# Altium PCB PCB1.PcbDoc
Units mil, origin at the board's own origin, x right, y up, seen from the top; angles counter-clockwise.
Board outline 2458.37 x 2458.37 mil, 2 copper layers (Top Layer, Bottom Layer); 25 components, 5 nets, 53 pads, 0 vias.
Unrouted connection lines stored in the file: 43.
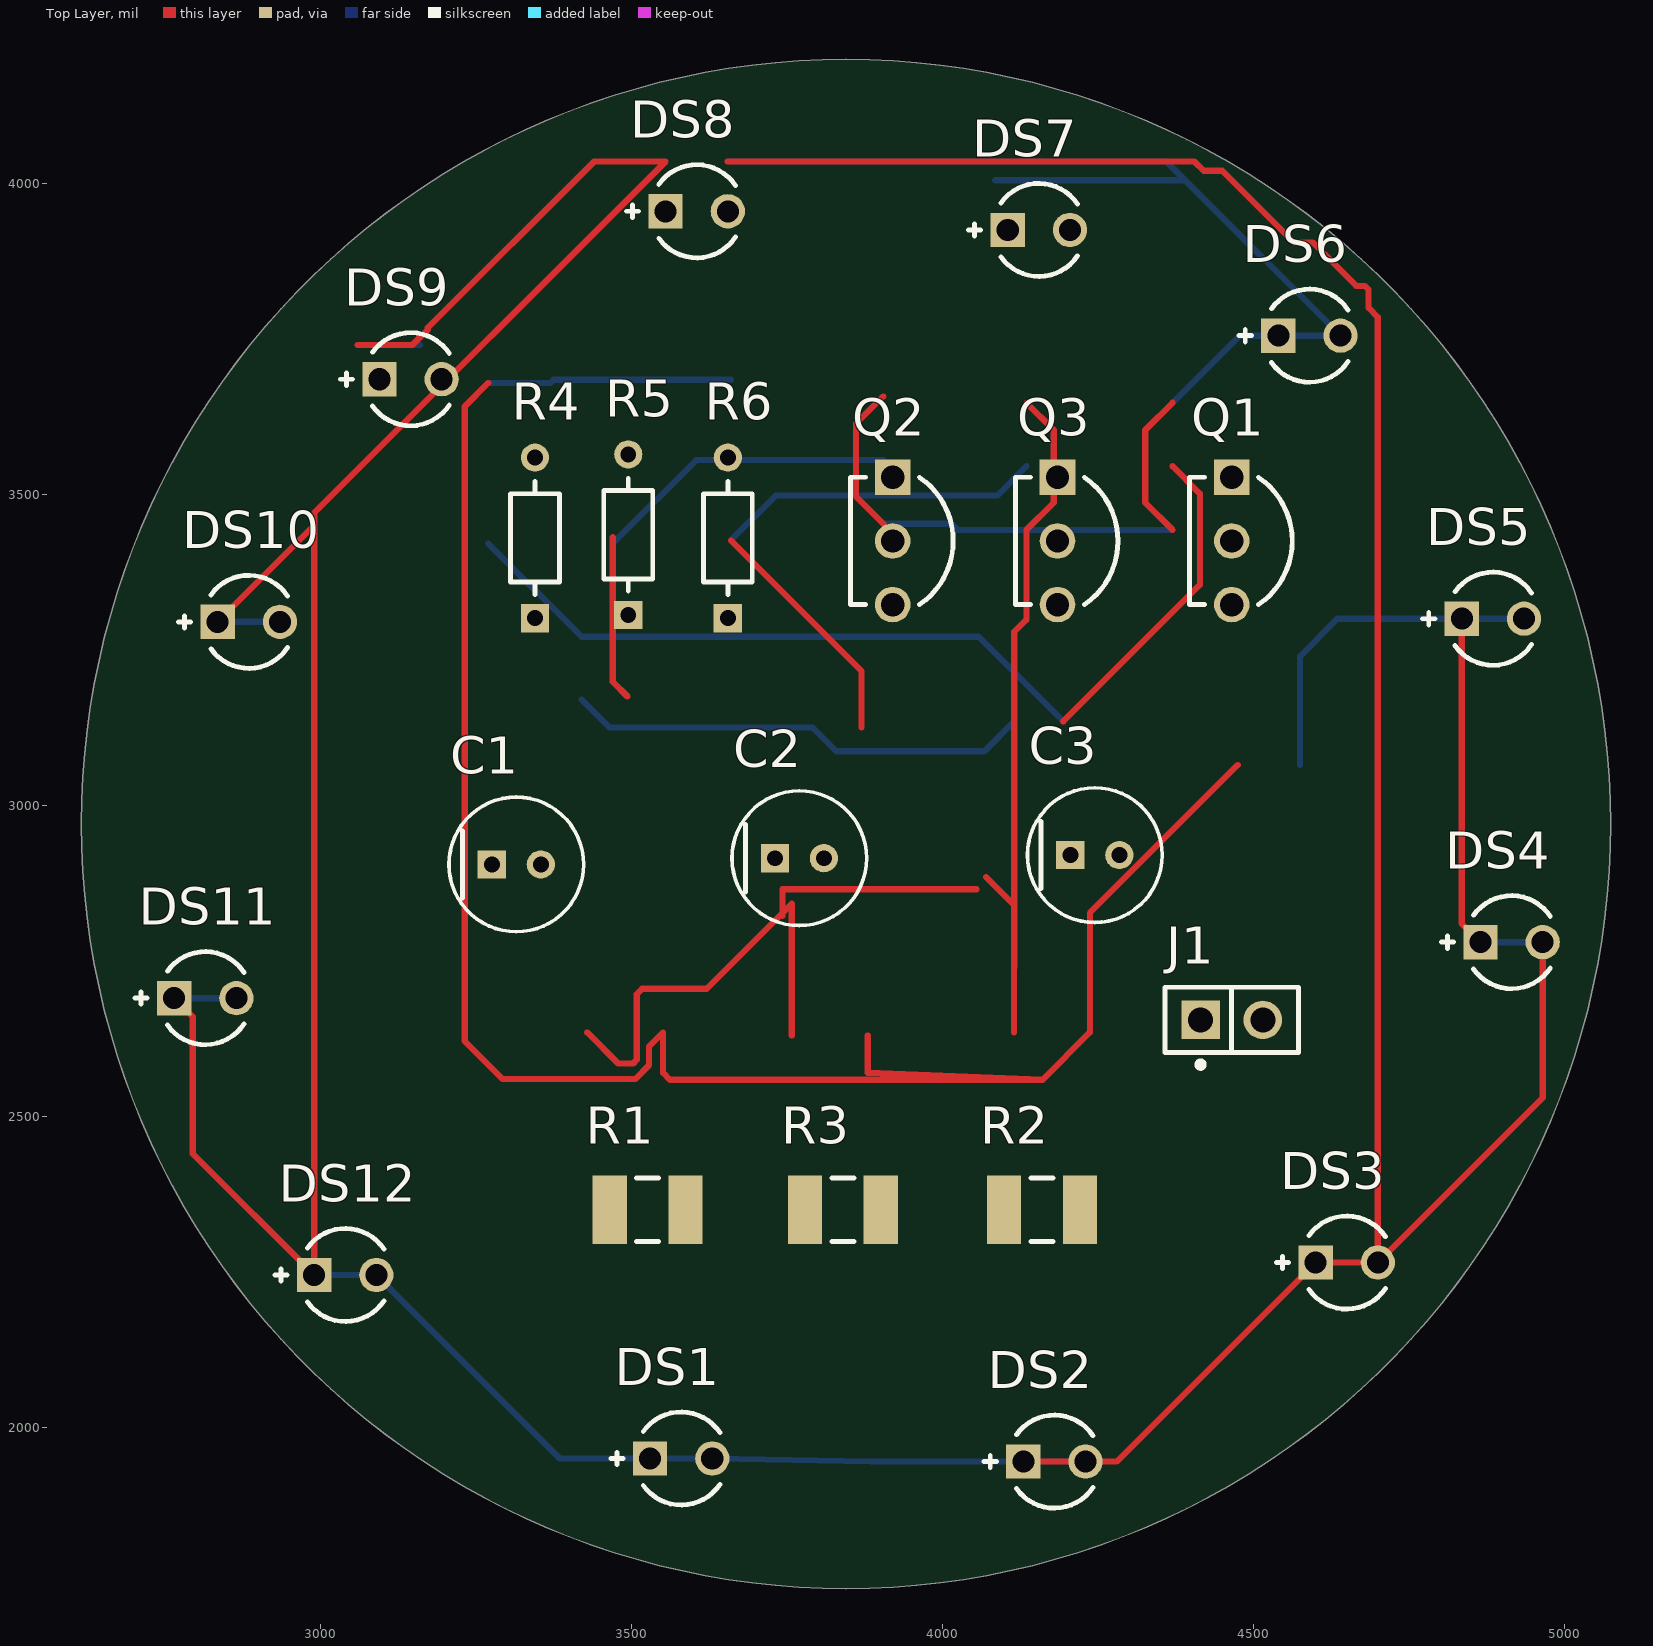
[diagram p0: Top Layer view]
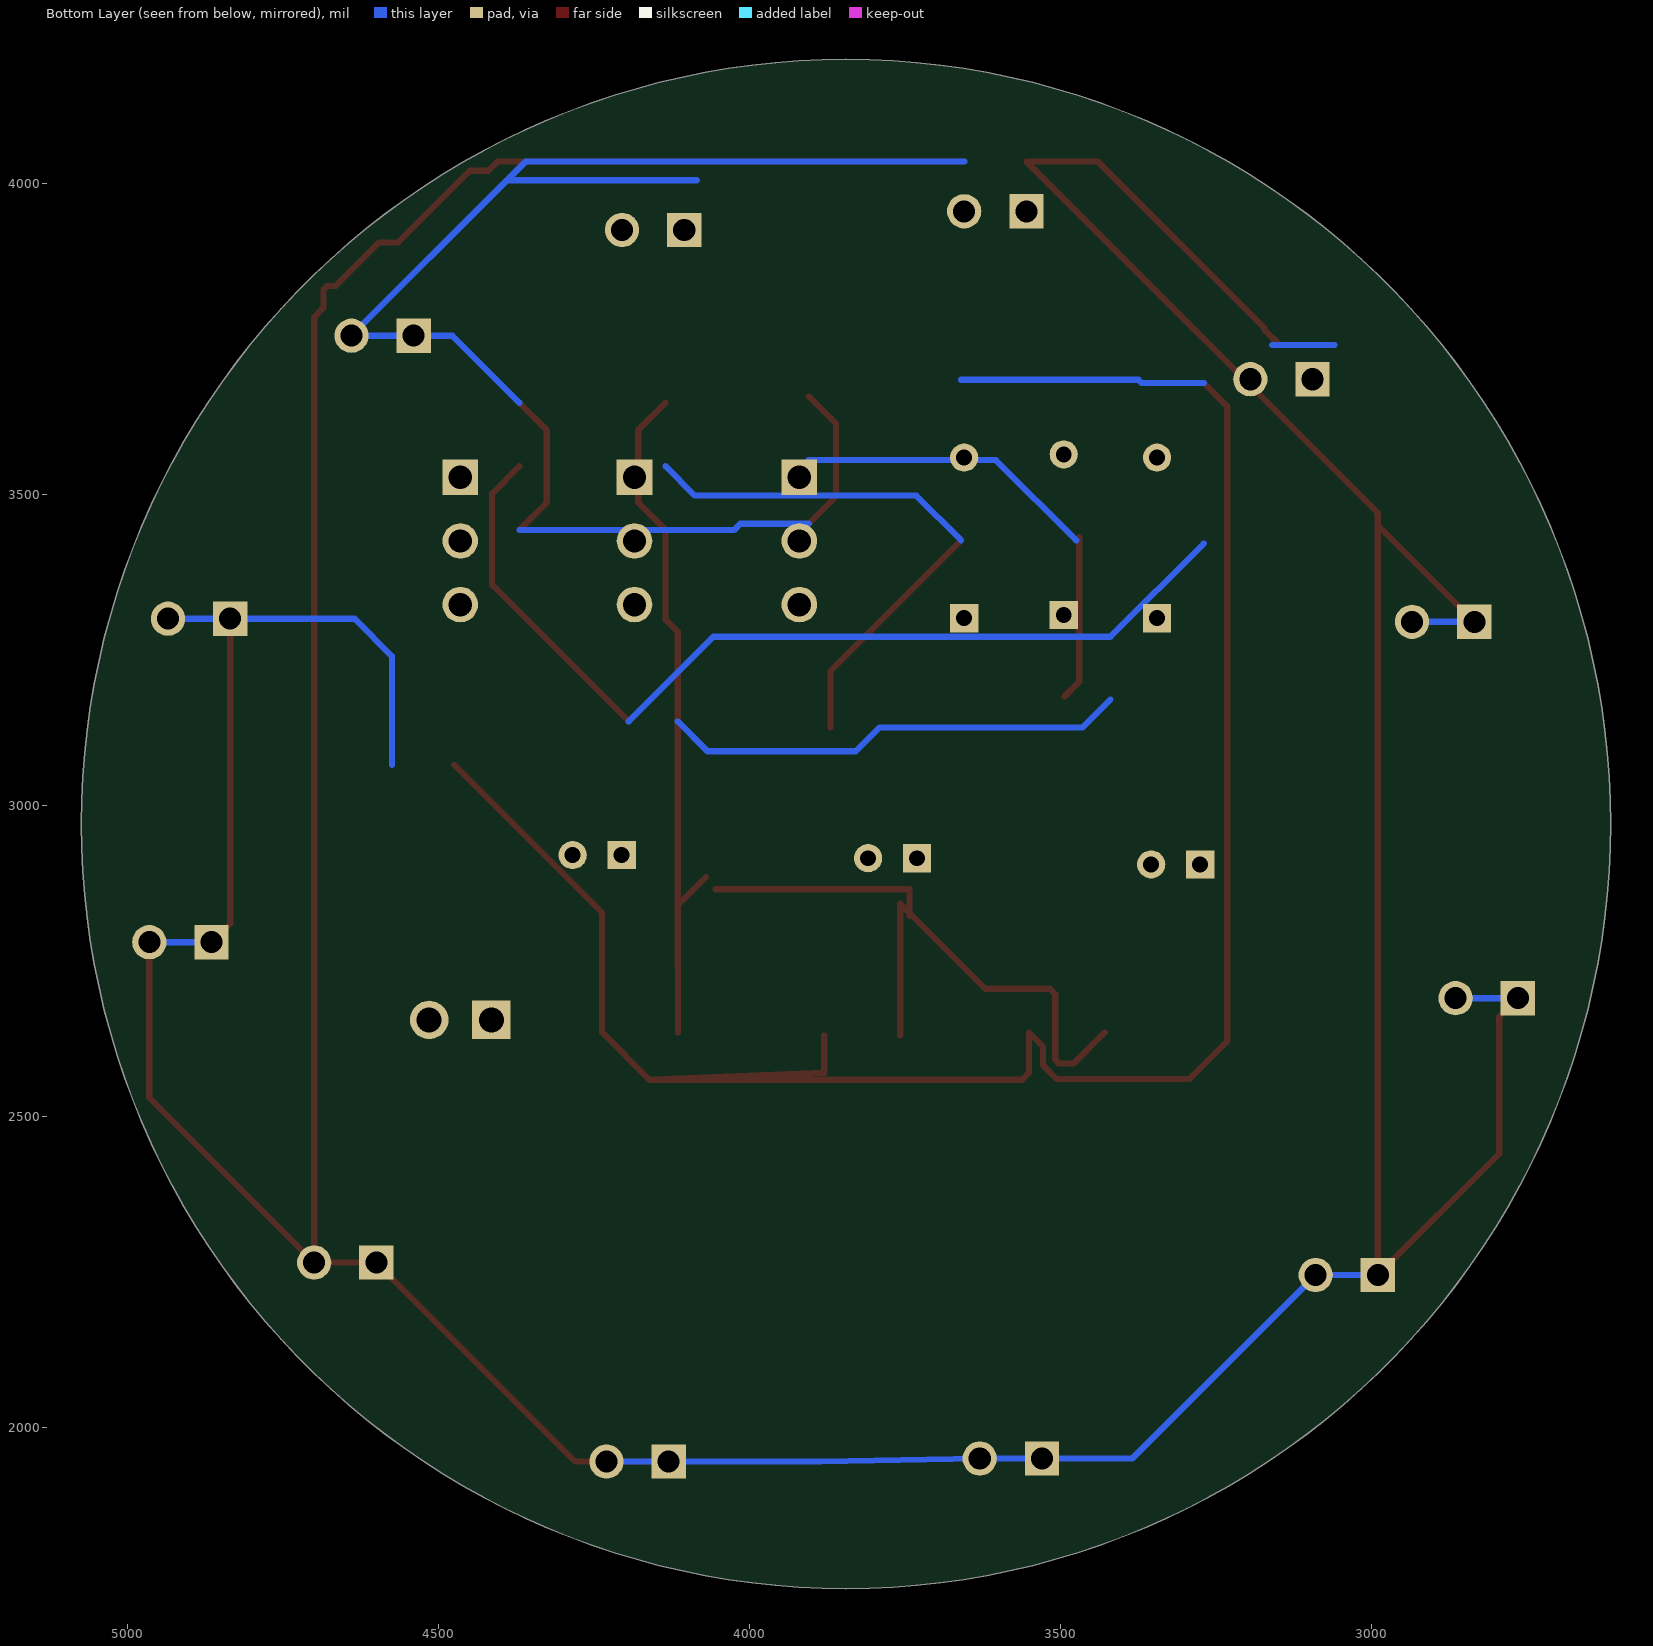
[diagram p1: Bottom Layer view, seen from below]

## Layer stack, top to bottom
Top Solder: solder mask 0.4, Solder Resist, Dk 3.5
Top Layer: signal copper 1.4
Dielectric 1: dielectric 12.6, FR-4, Dk 4.8
Bottom Layer: signal copper 1.4
Bottom Solder: solder mask 0.4, Solder Resist, Dk 3.5

## Board outline
2615.81,2970 ccw(c3845,2970) 3845,1740.81 ccw(c3845,2970) 5074.19,2970 ccw(c3845,2970) 3845,4199.19 ccw(c3845,2970)

## Design rules (kind name [scope] priority, off if disabled: settings)
Clearance [All] p1: gap=10 ignorepadtopadclearanceinfootprint=FALSE
PolygonConnect [All] p1: connectstyle=Relief reliefconductorwidth=10 reliefentries=4 polygonreliefangle="90 Angle" airgapwidth=10
RoutingVias [All] p1: holewidth=28 width=50 viastyle="Through Hole" minholewidth=28 minwidth=50 maxholewidth=28 maxwidth=50
SolderMaskExpansion [All] p1: expansion=0 istentingtop=FALSE
Width [All] p1: maxlimit=10 minlimit=10 preferedwidth=10
30 further rules are at their usual default settings.

## Components (designator, comment, footprint, x,y, rotation, side; value= is the part's Value field where it differs from the comment)
C1 "UVR2AR22MDD1TD" FP-UVR2AR22MDD1TD-MFG 3315,2905 r0 top
C2 "UVR2AR22MDD1TD" FP-UVR2AR22MDD1TD-MFG 3770,2915 r0 top
C3 "UVR2AR22MDD1TD" FP-UVR2AR22MDD1TD-MFG 4245,2920 r0 top
DS1 "LTL-1CHE" INDPR60-254-520X380X650 3580,1950 r0 top
DS2 "LTL-1CHE" INDPR60-254-520X380X650 4180,1945 r0 top
DS3 "LTL-1CHE" INDPR60-254-520X380X650 4650,2265 r0 top
DS4 "LTL-1CHE" INDPR60-254-520X380X650 4915,2780 r0 top
DS5 "LTL-1CHE" INDPR60-254-520X380X650 4885,3300 r0 top
DS6 "LTL-1CHE" INDPR60-254-520X380X650 4590,3755 r0 top
DS7 "LTL-1CHE" INDPR60-254-520X380X650 4155,3925 r0 top
DS8 "LTL-1CHE" INDPR60-254-520X380X650 3605,3955 r0 top
DS9 "LTL-1CHE" INDPR60-254-520X380X650 3145,3685 r0 top
DS10 "LTL-1CHE" INDPR60-254-520X380X650 2885,3295 r0 top
DS11 "LTL-1CHE" INDPR60-254-520X380X650 2815,2690 r0 top
DS12 "LTL-1CHE" INDPR60-254-520X380X650 3040,2245 r0 top
J1 "TSW-102-14-G-S" FP-TSW-102-14-G-S-MFG 4465,2655 r0 top
Q1 "2N5550TFR" FP-135AR-MFG 4479.96,3425 r0 top
Q2 "2N5550TFR" FP-135AR-MFG 3934.96,3425 r0 top
Q3 "2N5550TFR" FP-135AR-MFG 4199.96,3425 r0 top
R1 "CRCW1210330RJNTA" RESC3225X60X45ML20T20 3526.02,2350 r0 top
R2 "CRCW1210330RJNTA" RESC3225X60X45ML20T20 4160,2350 r0 top
R3 "CRCW1210330RJNTA" RESC3225X60X45ML20T20 3840,2350 r0 top
R4 "CF18JT10K0" FP-CF18-MFG 3345,3430 r90 top value=10kΩ
R5 "CF18JT10K0" FP-CF18-MFG 3495,3435 r90 top value=10kΩ
R6 "CF18JT10K0" FP-CF18-MFG 3655,3430 r90 top value=10kΩ

## Footprints (in the part's own frame and the unit in brackets; to place one, negate y for a bottom-side part, rotate by r counter-clockwise, add the part's x,y. Pads: shape width x height; smd on the part's side, far side on the other; paste and mask are expansions set on the pad)
FP-135AR-MFG [mm]
  rect 1.45x1.45 hole 0.95 paste-2539.97 mask+0: 1(-0.38,2.6)
  round 1.45 hole 0.95 paste-2539.97 mask+0: 2(-0.38,0) 3(-0.38,-2.6)
  silkscreen extent -2.1,-2.6 2.09,2.6, body extent -2.19,-3.42 2.19,3.42, height 0.25
FP-CF18-MFG [mm]
  rect 1.15x1.15 hole 0.65 paste-2539.97 mask+0: 1(-3.28,0)
  round 1.15 hole 0.65 paste-2539.97 mask+0: 2(3.28,0)
  silkscreen extent -2.3,-1 2.3,1, body extent -3.96,-1.1 3.96,1.1, height 0.25
FP-TSW-102-14-G-S-MFG [mm]
  rect 1.57x1.57 hole 1.02 paste-2539.97 mask+0: 1(-1.27,0)
  round 1.57 hole 1.02 paste-2539.97 mask+0: 2(1.27,0)
  silkscreen extent -2.73,-1.95 2.73,1.34, body extent -2.83,-1.44 2.83,1.44, height 0.25
FP-UVR2AR22MDD1TD-MFG [mm]
  rect 1.15x1.15 hole 0.65 paste-2539.97 mask+0: 1(-1,0)
  round 1.15 hole 0.65 paste-2539.97 mask+0: 2(1,0)
  silkscreen extent -2.75,-2.75 2.75,2.75, body extent -2.85,-2.85 2.85,2.85, height 0.25
INDPR60-254-520X380X650 [mm] "THD, 2-Leads, Dia 3.8mm, Pitch 2.54mm"
  rect 1.4x1.4 hole 0.9: 1(-1.27,0)
  round 1.4 hole 0.9: 2(1.27,0)
  silkscreen extent -2.87,-1.9 1.58,1.9, body extent -1.9,-1.9 1.9,1.9, height 6.5
RESC3225X60X45ML20T20 [mm] "Chip Resistor, 2-Leads, Body 3.20x2.50mm, IPC Low Density"
  rect 1.4x2.8 smd: 1(-1.55,0) 2(1.55,0)
  silkscreen extent -0.45,-1.3 0.45,1.3, body extent -1.7,-1.35 1.7,1.35, height 0.6

## Part data
C1 C2 C3: library part CMP-12462-000035-1, "CAP ALUM 0.22UF 20% 100V RADIAL", Capacitance=220nF, Case/Package=Radial, Dielectric Material=Aluminium, Max Operating Temperature=85°C, Min Operating Temperature=-40°C, Package Quantity=2000, Ripple Current=4.7mA, Tolerance=20%, Voltage Rating=100V, Diameter=5mm, Dissipation Factor=0.08%, Height=11mm, Height - Seated (Max)=0.492inch, Lead Pitch=2mm, Lead/Base Style=Straight, Length=11mm, Life (Hours)=2000Hour, Mount="Through Hole", Packaging="Tape and Reel", REACH SVHC="No SVHC", RoHS Compliant=Yes, Series=VR, Termination=Radial, Voltage Rating (DC)=100V
DS1 DS2 DS3 DS4 DS5 DS6 DS7 DS8 DS9 DS10 DS11 DS12: library part CMP-1674-00005-1, "Radial LED, 12.6 mcd, 20 mA, 2 V, -55 to 100 degC, 2-Pin THD, RoHS, Bulk", Case\Package=Radial, Current Rating="3.6 A", Max Operating Temperature="130 degC", Min Operating Temperature="-40 degC", Package Quantity=55, Resistance="0.045 Ohm", Tolerance=20%, ComponentLink1Description="Manufacturer URL", ComponentLink1URL=http://www.us.liteon.com/, ComponentLink2Description=Datasheet, ComponentLink2URL=https://datasheet.ciiva.com/15117/getdatasheetpartid-187746-15117985.pdf, DatasheetVersion=Dec-03, Height="1.1 inch", Lead Pitch="11.44 mm", Length="0.97 inch", Mount="Through Hole", PackageDescription="2-Pin Through Hole Device, Dia 3.8 mm, Pitch 2.54 mm", PackageReference=LTL-1CHE, Packaging=Tray, Radiation Hardening=No, RoHSCompliant=true, Shielding=Unshielded, Width="0.62 inch"
J1: library part CMP-02766-001740-1, "CONN HEADER VERT 2POS 2.54MM", Color=Black, Flammability Rating="UL94 V-0", Max Current Rating=7.6A, Max Operating Temperature=125°C, Max Voltage Rating (AC)=550V, Min Operating Temperature=-55°C, Package Quantity=1, Connector Type=Header, Contact Finish - Mating=GOLD, Contact Material=Bronze, Contact Mating Length=0.32inch, Contact Plating=Gold, Contact Shape=Square, Contact Type="Male Pin", Depth=2.54mm, Fastening Type=Pull, Gender=Male, Housing Color=Black, Housing Material=Polyester, Insulation Color=Black, Insulation Material=PBT, Lead Free="Lead Free", Length=5.08mm, Mount="Through Hole", Number of Contacts=2, Number of Positions=2, Number of Rows=1, Orientation=Straight, Packaging=Bulk, Pitch=2.54mm, Radiation Hardening=No, REACH SVHC="No SVHC", RoHS Compliant=Yes, Series=TSW, Termination=Solder, Width=2.54mm
Q1 Q2 Q3: library part CMP-00278-84408887-1, "2N5550TFR Transistor, bjt, npn, 140V V(Br)Ceo, 600Ma I(C), to-92 Rohs Compliant: Yes", Case/Package=TO-92-3, Collector Base Voltage (VCBO)=160V, Collector Emitter Breakdown Voltage=140V, Collector Emitter Saturation Voltage=250mV, Current Rating=600mA, Emitter Base Voltage (VEBO)=6V, Frequency=300MHz, Manufacturer Lifecycle Status=ACTIVE, Max Junction Temperature (Tj)=150°C, Max Power Dissipation=625mW, Min Operating Temperature=-55°C, Collector Emitter Voltage (VCEO)=140V, Element Configuration=Single, Gain Bandwidth Product=300MHz, Height=4.58mm, hFE Min=60, Lead Free="Lead Free", Length=4.58mm, Lifecycle Status=Production, Max Breakdown Voltage=140V, Max Collector Current=600mA, Max Frequency=300MHz, Max Operating Temperature=150°C, Mount="Through Hole", NexarPartId=84408887, Number of Elements=1, Number of Pins=3, Polarity=NPN, Power Dissipation=625mW, Radiation Hardening=No, RoHS=Compliant, Schedule B="8541210080, 8541210080", Transition Frequency=300MHz, Voltage Rating (DC)=140V, Weight=240mg, Width=3.86mm
R1 R2 R3: library part CMP-2005-00707-1, Manufacturer="Vishay Dale", Part Number=CRCW1210330RJNTA
R4 R5 R6: library part CMP-26528-000002-1, "RES 10K OHM 1/8W 5% CF AXIAL", Manufacturer="Stackpole Electronics", Package=CF18, Power Rating=0.125W, Resistance=10kΩ, Temperature="-55°C to +155°C", Temperature Coefficient=0-500ppm/°C, Temperature Range High=+155°C, Temperature Range Low=-55°C, Tolerance=5%, Voltage Rating=250V, Automotive=No, Category=Res, ComponentLink2Description=Datasheet, ComponentLink2URL=http://www.seielect.com/Catalog/SEI-CF_CFM.pdf, Composition="Carbon Film", Device Class L1="Passive Components", Device Class L2=Resistors, Device Class L3="Through-Hole Resistors", Digikey Description="RES 10K OHM 1/8W 5% CF AXIAL", Height=2mm, Ipc Land Pattern Name=RESAD656W65L360D200, Lead Free=Yes, Manufacturer Part Number=CF18JT10K0, Octopart=https://octopart.com/cf18jt10k0-stackpole+electronics-19205642, RoHS=TRUE, Series=CF

## Nets (pads, with @x,y where several pads share a name; then routed paths per layer and width w, separated by ;. In a path a pad name is that pad's centre, name@x,y a point inside that pad or via, vN(x,y) a via of type N, cw(c..) or ccw(c..) an arc to the next point about the centre after c; other vN are vias at no path point)
NetC1_1: C1.1 C2.1 C3.1 DS1.1 DS1.2 DS2.1 DS2.2 DS3.1 DS3.2 DS4.1 DS4.2 DS5.1 DS5.2 DS6.1 DS6.2 DS7.1 DS7.2 DS8.1 DS8.2 DS9.1 DS9.2 DS10.1 DS10.2 DS11.1 DS11.2 DS12.1 DS12.2 J1.2 Q1.1 Q1.3 Q2.1 Q2.3 Q3.1 Q3.3 R1.1 R2.1 R3.1 | length 16100.1
  Top Layer w10: DS11.1 2795,2660 2795,2440 DS12.1 2990,3450 ; DS10.1 2990,3450 ; 3060,3740 3147.79,3740 3172.59,3764.8 3172.59,3767.59 3440,4035 3555,4035 2990,3470 2990,3450 ; 3428.98,2635 3478.98,2585 3502.61,2585 3508.46,2590.86 3508.46,2696.33 3517.25,2705.12 3621.14,2705.12 3757.95,2841.93 3757.95,2630 ; 3655,4035 4405,4035 4420,4020 4450,4020 4565,3905 4595,3905 4665,3835 4679.14,3835 4685,3829.14 4685,3800 4700,3785 DS3.2 ; 3742.95,2821.93 3742.95,2865 4055,2865 ; 3905.04,3452.64 3861,3496.68 3861,3613.32 3905.04,3657.36 ; 4070,2885 4115,2840 4115,2635 4115.52,2840 4115.63,2885.63 4115.63,3135 4115.63,3279 4135.04,3298.41 4135.04,3322.64 4135.04,3442.64 4179,3486.6 4179,3603.4 4135.04,3647.36 ; DS2.1 DS2.2 4280,1945 DS3.1 DS3.2 ; 4370,3442.64 4326,3486.64 4326,3603.36 4370,3647.36 ; DS5.1 4835,2810 DS4.1 ; DS4.2 4965,2530 DS3.2
  Bottom Layer w10: DS11.1 DS11.2 ; DS10.1 DS10.2 ; DS12.1 DS12.2 3385,1950 DS1.1 DS1.2 3885,1945 DS2.1 DS2.2 ; 3060,3740 3160,3740 ; 3420,3170 3465,3125 3791.26,3125 3829.26,3087 4067.63,3087 4115.63,3135 ; 3655,4035 4360,4035 4390,4005 ; 3905.04,3452.64 4015,3452.64 4025,3442.64 4135.04,3442.64 4370,3442.64 ; 4085,4005 4185,4005 4390,4005 ; 4370,3647.36 4477.64,3755 DS6.1 DS6.2 4390,4005 ; 4575,3065 4575,3240 4635,3300 DS5.1 DS5.2 ; DS4.1 DS4.2
NetC1_2: C1.2 Q2.2 R5.1 | length 869.2
  Top Layer w10: 3470,3310.87 3470,3430.87 3470,3198.74 3493.74,3175
  Bottom Layer w10: 3475,3425.87 3604.13,3555 3905.04,3555
NetC2_2: C2.2 Q3.2 R6.1 | length 912.2
  Top Layer w10: 3660,3425.87 3870,3215.87 3870,3125
  Bottom Layer w10: 3660,3425.87 3732.13,3498 4088.04,3498 4135.04,3545
NetC3_2: C3.2 Q1.2 R4.1 | length 1562
  Top Layer w10: 4194.37,3135 4414,3354.63 4414,3501 4370,3545
  Bottom Layer w10: 3270,3420.87 3419.87,3271 4058.37,3271 4194.37,3135
NetJ1_1: J1.1 R1.2 R2.2 R3.2 R4.2 R5.2 R6.2 | length 3515.7
  Top Layer w10: 3270,3679.13 3232,3641.13 3232,2621 3293,2560 3505.89,2560 3528.46,2582.57 3528.46,2612.44 3551.02,2635 3551.02,2570 3562.02,2559 4161.05,2559 ; 3880,2630 3880,2570 4161.05,2559 ; 4475,3065 4237.05,2827.05 4237.05,2635 4161.05,2559
  Bottom Layer w10: 3270,3679.13 3370,3679.13 3375,3684.13 3475,3684.13 3660,3684.13

## Silkscreen, mask and mechanical layers (free items; w line width, h text height)
Mechanical 1:
  circle w10: c3845,2970 r1229.19
  circle w10: c3765,2955 r5